# EAGLE board atmega_fusebit_doctor_V2e (EAGLE 5.07)
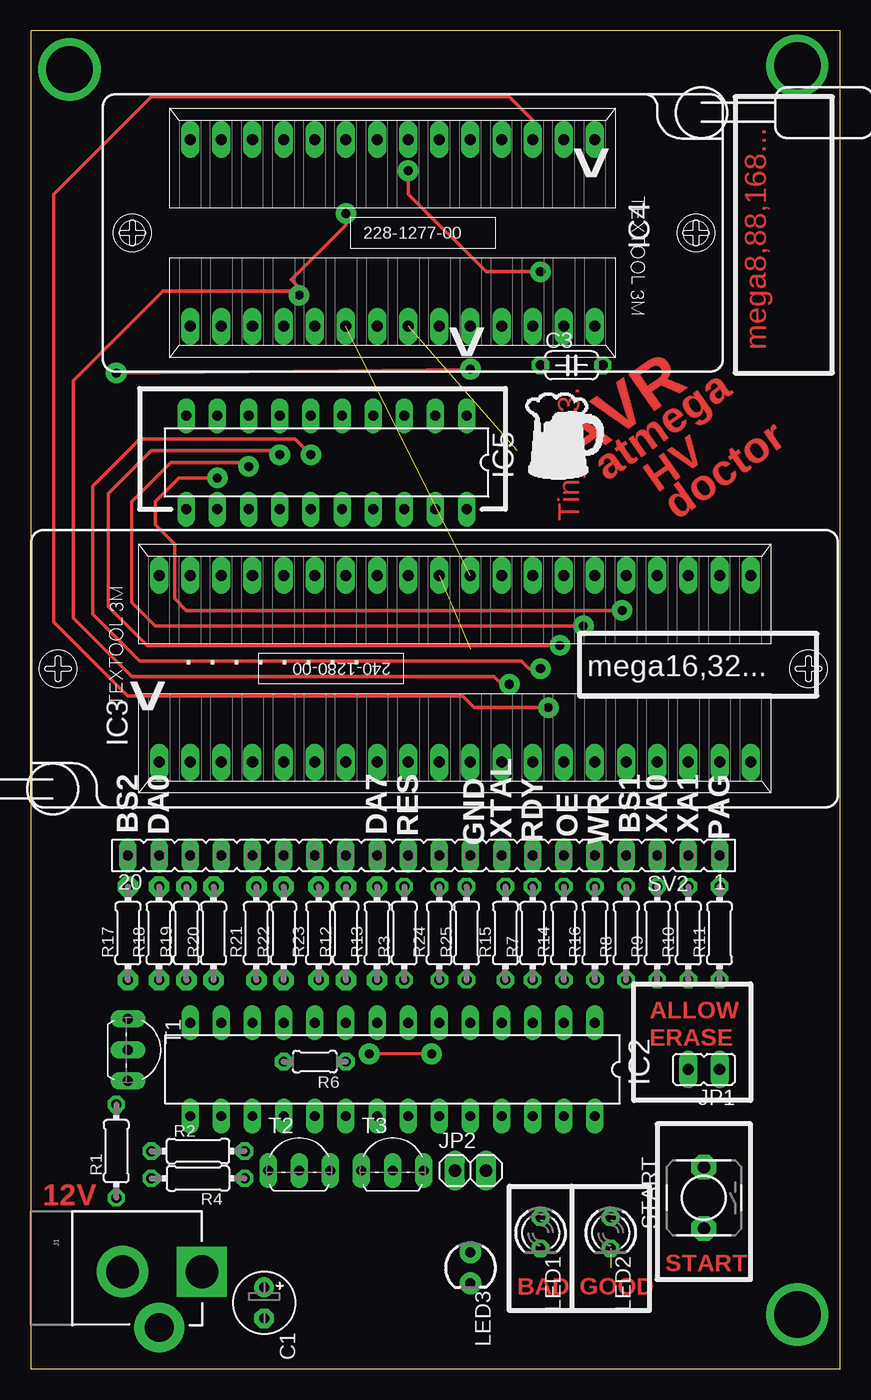
[diagram p0: board, top side]
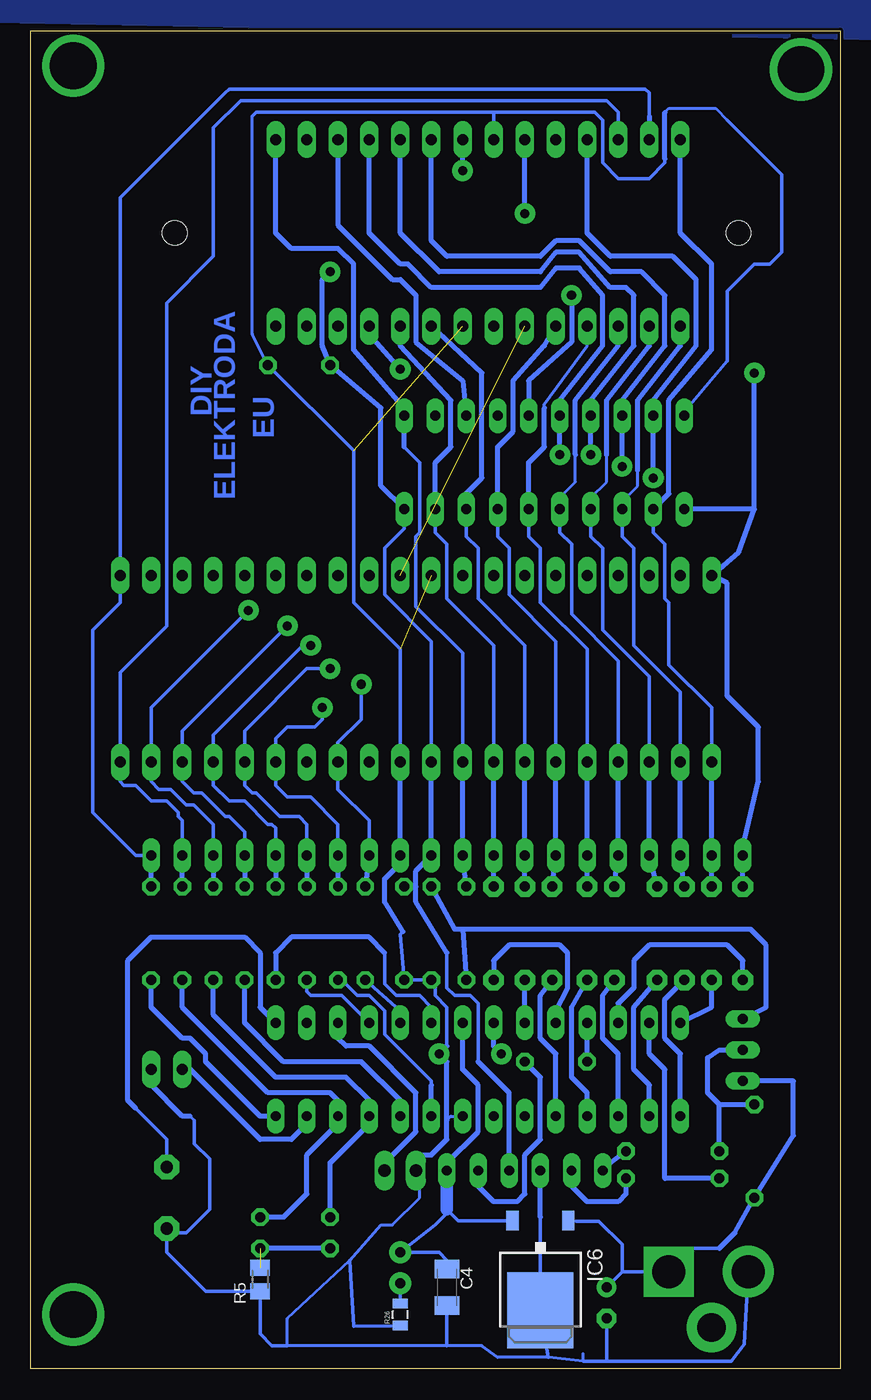
[diagram p1: board, bottom side, seen from below]

Size 66.03 x 109.21 mm. Coordinates in mm from the lower left corner, seen from the top.
Outline: 0,109.21 0,0 66.03,0 66.03,109.21 0,109.21
Copper layers (1*16): Top 0.035mm / dielectric 1.5mm / Bottom 0.035mm
Design rules "SparkFun": minimum track width 8mil, minimum drill 20mil, track to track 8mil, track to pad 8mil, pad to pad 8mil, via to via 8mil, smd to smd 8mil, copper to edge 10mil, drill to drill 8mil, minimum pad ring 12mil, minimum via ring 10mil, stop-mask expansion 4mil, vias tented up to drill 25mil, thermal gap 10mil

## Footprints (pad centres in the part's own frame; a part is rotated, then mirrored left to right if it is on the bottom)
E2,5-5 = drill 0.813 pad 1.6 round: + -1.27,0 | drill 0.813 pad 1.6 octagon: - 1.27,0
C050-024X044 = drill 0.813 octagon: 1 -2.54,0; 2 2.54,0
C1206K = smd 1.5 x 2: 1 -1.5,0; 2 1.5,0
DIL28-3 = drill 0.813 long: 1 -16.51,-3.81; 2 -13.97,-3.81; 3 -11.43,-3.81; 4 -8.89,-3.81; 5 -6.35,-3.81; 6 -3.81,-3.81; 7 -1.27,-3.81; 8 1.27,-3.81; 9 3.81,-3.81; 10 6.35,-3.81; 11 8.89,-3.81; 12 11.43,-3.81; 13 13.97,-3.81; 14 16.51,-3.81; 15 16.51,3.81; 16 13.97,3.81; 17 11.43,3.81; 18 8.89,3.81; 19 6.35,3.81; 20 3.81,3.81; 21 1.27,3.81; 22 -1.27,3.81; 23 -3.81,3.81; 24 -6.35,3.81; 25 -8.89,3.81; 26 -11.43,3.81; 27 -13.97,3.81; 28 -16.51,3.81
240-1280-00-0602J = drill 0.9 long: 1 -24.13,-7.62; 2 -21.59,-7.62; 3 -19.05,-7.62; 4 -16.51,-7.62; 5 -13.97,-7.62; 6 -11.43,-7.62; 7 -8.89,-7.62; 8 -6.35,-7.62; 9 -3.81,-7.62; 10 -1.27,-7.62; 11 1.27,-7.62; 12 3.81,-7.62; 13 6.35,-7.62; 14 8.89,-7.62; 15 11.43,-7.62; 16 13.97,-7.62; 17 16.51,-7.62; 18 19.05,-7.62; 19 21.59,-7.62; 20 24.13,-7.62; 21 24.13,7.62; 22 21.59,7.62; 23 19.05,7.62; 24 16.51,7.62; 25 13.97,7.62; 26 11.43,7.62; 27 8.89,7.62; 28 6.35,7.62; 29 3.81,7.62; 30 1.27,7.62; 31 -1.27,7.62; 32 -3.81,7.62; 33 -6.35,7.62; 34 -8.89,7.62; 35 -11.43,7.62; 36 -13.97,7.62; 37 -16.51,7.62; 38 -19.05,7.62; 39 -21.59,7.62; 40 -24.13,7.62
228-1277-00-0602J = drill 0.9 long: 1 -16.51,-7.62; 2 -13.97,-7.62; 3 -11.43,-7.62; 4 -8.89,-7.62; 5 -6.35,-7.62; 6 -3.81,-7.62; 7 -1.27,-7.62; 8 1.27,-7.62; 9 3.81,-7.62; 10 6.35,-7.62; 11 8.89,-7.62; 12 11.43,-7.62; 13 13.97,-7.62; 14 16.51,-7.62; 15 16.51,7.62; 16 13.97,7.62; 17 11.43,7.62; 18 8.89,7.62; 19 6.35,7.62; 20 3.81,7.62; 21 1.27,7.62; 22 -1.27,7.62; 23 -3.81,7.62; 24 -6.35,7.62; 25 -8.89,7.62; 26 -11.43,7.62; 27 -13.97,7.62; 28 -16.51,7.62 | hole 2: 21.24,0; -24.74,0
DIL20 = drill 0.813 long: 1 -11.43,-3.81; 2 -8.89,-3.81; 3 -6.35,-3.81; 4 -3.81,-3.81; 5 -1.27,-3.81; 6 1.27,-3.81; 7 3.81,-3.81; 8 6.35,-3.81; 9 8.89,-3.81; 10 11.43,-3.81; 11 11.43,3.81; 12 8.89,3.81; 13 6.35,3.81; 14 3.81,3.81; 15 1.27,3.81; 16 -1.27,3.81; 17 -3.81,3.81; 18 -6.35,3.81; 19 -8.89,3.81; 20 -11.43,3.81
TO252 = smd 1 x 1.6: 1 -2.28,-4.8; 2 2.28,-4.8 | smd 5.4 x 6.2: 3 0,2.5
POWER_JACK_2.1X5.5_BIG_PTH = drill 2.667 pad 4.191 round: GND 0,-0.127 | drill 2.337 pad 4.064 round: GNDBREAK 4.547,2.87 | drill 2.667 pad 4.064 square: PWR 0,6.35
JP1 = drill 0.914 long: 1 0,-1.27; 2 0,1.27
1X02 = drill 1.016 long: 1 -1.27,0; 2 1.27,0
LED3MM = drill 0.813 octagon: A -1.27,0; K 1.27,0
LED3MM' = drill 0.813 pad 1.778 round: A -1.27,0; K 1.27,0
0204/7 = drill 0.813 octagon: 1 -3.81,0; 2 3.81,0
M0805 = smd 1.3 x 1.6: 1 -0.95,0; 2 0.95,0
0204/5 = drill 0.813 octagon: 1 -2.54,0; 2 2.54,0
0204/7' = drill 0.813 pad 1.676 octagon: 1 -3.81,0; 2 3.81,0
0805 = smd 0.8 x 1.2: 1 -0.9,0; 2 0.9,0
ALPS-SKHV = drill 1.016 pad 2.032 octagon: 2 -2.51,0; 3 2.51,0
FE20 = drill 0.813 long: 1 -24.13,0; 2 -21.59,0; 3 -19.05,0; 4 -16.51,0; 5 -13.97,0; 6 -11.43,0; 7 -8.89,0; 8 -6.35,0; 9 -3.81,0; 10 -1.27,0; 11 1.27,0; 12 3.81,0; 13 6.35,0; 14 8.89,0; 15 11.43,0; 16 13.97,0; 17 16.51,0; 18 19.05,0; 19 21.59,0; 20 24.13,0
TO92-EBC = drill 0.813 long: B 0,-1.27; C -2.54,-1.27; E 2.54,-1.27

## Placement (x,y rotation side)
C1  100uF  [E2,5-5]  19.05,5.39 270 top
C3  10nF  [C050-024X044]  44.13,81.91 0 top
C4  [C1206K]  32.07,6.66 270 bottom
IC2  ATMEGA8-DOC  [DIL28-3]  29.53,24.44 180 top
IC3  MEGA16/32/644...  [240-1280-00-0602J]  34.61,57.14 0 top
IC4  MEGA8/88/168...  [228-1277-00-0602J]  29.53,92.7 180 top
IC5  AT90S2313/TINY2313  [DIL20]  24.13,73.97 180 top
IC6  7805DT  [TO252]  24.45,7.29 180 bottom
J1  POWER  [POWER_JACK_2.1X5.5_BIG_PTH]  7.62,7.93 270 top
JP1  ERASE  [JP1]  54.93,24.44 90 top
JP2  RS232  [1X02]  35.88,16.18 0 top
LED1  red  [LED3MM]  41.59,11.1 270 top
LED2  green  [LED3MM]  47.31,11.1 270 top
LED3  RED  [LED3MM']  35.88,8.24 270 top
R1  10K  [0204/7]  6.98,17.77 90 top
R2  1K  [0204/7]  13.65,17.77 0 top
R3  100  [0204/7]  30.48,35.55 90 top
R4  4K7  [0204/7]  13.65,15.55 180 top
R5  330  [M0805]  47.31,7.29 90 bottom
R6  4K7  [0204/5]  23.18,25.07 180 top
R7  1K  [0204/7]  40.96,35.55 90 top
R8  1K  [0204/7]  48.58,35.55 90 top
R9  1K  [0204/7]  51.12,35.55 90 top
R10  1K  [0204/7]  53.66,35.55 90 top
R11  1K  [0204/7]  56.2,35.55 90 top
R12  1K  [0204/7']  25.72,35.55 90 top
R13  1K  [0204/7']  28.26,35.55 90 top
R14  1K  [0204/7]  43.5,35.55 90 top
R15  1K  [0204/7]  38.73,35.55 90 top
R16  1K  [0204/7]  46.04,35.55 90 top
R17  1K  [0204/7']  7.94,35.55 90 top
R18  1K  [0204/7']  10.48,35.55 90 top
R19  1K  [0204/7']  12.7,35.55 90 top
R20  1K  [0204/7']  14.92,35.55 90 top
R21  1K  [0204/7']  18.41,35.55 90 top
R22  1K  [0204/7']  20.64,35.55 90 top
R23  1K  [0204/7']  23.5,35.55 90 top
R24  1K  [0204/7]  33.34,35.55 90 top
R25  100  [0204/7]  35.56,35.55 90 top
R26  270  [0805]  35.88,4.43 90 bottom
START  [ALPS-SKHV]  54.93,13.96 90 top
SV2  [FE20]  32.07,41.9 180 top
T1  BC557  [TO92-EBC]  9.21,26.02 270 top
T2  BC547  [TO92-EBC]  21.91,17.45 0 top
T3  BC557  [TO92-EBC]  29.53,17.45 0 top

## Library data of the parts
C1 C3 R1-R11 R14-R16 R24 R25 = rcl
C4 IC3 IC4 J1 LED3 R12 R13 R17-R23 R26 START = digital-toy
IC2 IC5 = atmel
IC6 = linear
JP1 = jumper
JP2 = pinhead
LED1 LED2 = led
SV2 = con-lsta
T1-T3 = transistor

## Nets
+5V: C3.1 IC3.10 IC4.7 IC5.20 R25.2 SV2.10 T3.C
+12V: IC3.9 IC4.1 IC5.1 R3.2 SV2.11
AVCC: IC3.30 IC4.20
BS1: IC3.18 IC4.6 IC5.8 R8.2 SV2.4
BS2: IC3.40 IC4.25 IC5.11 R17.2 SV2.20
DATA0: IC3.1 IC4.14 IC5.12 R18.2 SV2.19
DATA1: IC3.2 IC4.15 IC5.13 R19.2 SV2.18
DATA2: IC3.3 IC4.16 IC5.14 R20.2 SV2.17
DATA3: IC3.4 IC4.17 IC5.15 R21.2 SV2.16
DATA4: IC3.5 IC4.18 IC5.16 R22.2 SV2.15
DATA5: IC3.6 IC4.19 IC5.17 R23.2 SV2.14
DATA6: IC3.7 IC4.23 IC5.18 R12.2 SV2.13
DATA7: IC3.8 IC4.24 IC5.19 R13.2 SV2.12
GND: C1.- C3.2 C4.2 IC2.8 IC2.22 IC3.11 IC3.31 IC4.8 IC4.22 IC5.10 IC6.3 J1.GND JP1.1 JP2.1 R5.1 R24.1 R25.1 R26.1 START.2 SV2.9 T2.E
N$1: R6.1 T3.B
N$2: IC2.14 R18.1
N$3: IC2.3 JP2.2
N$4: IC2.28 R11.1
N$5: IC2.6 R16.1
N$6: IC2.4 R14.1
N$7: LED3.K R26.2
N$8: R2.2 T2.C
N$9: IC2.9 R12.1
N$10: IC2.10 R13.1
N$11: IC2.13 R4.2
N$12: IC2.11 R6.2
N$14: IC2.15 R19.1
N$16: IC2.16 R20.1
N$19: IC2.5 R15.1
N$21: IC2.23 R7.1
N$22: R3.1 R24.2 T1.C
N$24: IC2.17 R21.1
N$25: IC2.18 R22.1
N$26: IC2.19 R23.1
N$27: IC2.12 R17.1
N$29: R4.1 T2.B
N$31: IC2.27 JP1.2
N$32: LED1.K LED2.K R5.2
N$34: R1.2 R2.1 T1.B
N$42: IC2.24 R8.1
N$43: IC2.1 START.3
N$47: IC2.26 LED2.A R10.1
N$48: IC2.25 LED1.A R9.1
OE: IC3.16 IC4.4 IC5.6 R14.2 SV2.6
PAG: IC3.21 IC4.13 R11.2 SV2.1
RDY: IC3.15 IC4.3 IC5.3 R7.2 SV2.7
V+: C1.+ IC6.1 J1.PWR R1.1 T1.E
VCC: C4.1 IC2.7 IC6.2 LED3.A T3.E
WR: IC3.17 IC4.5 IC5.7 R16.2 SV2.5
XA0: IC3.19 IC4.11 IC5.9 R9.2 SV2.3
XA1: IC3.20 IC4.12 R10.2 SV2.2
XTAL1: IC3.13 IC4.9 IC5.5 R15.2 SV2.8

## Tracks (layer width: path | path; a pad name or v marks a point on that pad's centre or on a via)
+5V  (via drill 0.74 pad 1.68)
  Top 0.305: v41.59,89.53 37.15,89.53 30.8,95.88 v30.8,97.78
  Bottom 0.305: 29.53,25.07 29.53,29.84 30.16,30.47 31.43,30.47 32.07,31.11 32.07,33.96 | IC3.10 33.34,59.36 37.15,63.17 37.15,66.98 35.56,68.57 IC5.20
  Bottom 0.406: v30.8,97.78 IC4.7 | IC5.20 37.47,72.06 37.47,78.41 C3.1 42.23,83.49 42.23,88.89 v41.59,89.53 | IC3.10 SV2.10 34.61,40.63 34.61,39.36 | 34.61,39.36 34.61,38.09 32.07,33.96 | T3.C 26.99,22.53 29.53,25.07 | 34.61,39.36 R25.2
+12V
  Bottom 0.305: 35.56,75.24 34.29,73.97 34.29,68.25 34.61,67.94 34.61,62.22 30.8,58.41 IC3.9
  Bottom 0.406: IC4.1 46.04,92.7 44.77,91.43 40.96,91.43 39.69,90.16 39.69,83.17 35.56,78.41 IC5.1 35.56,75.24 | SV2.11 IC3.9 | SV2.11 30.8,41.27 | R3.2 SV2.11
AVCC  (1 unrouted)
BS1  (via drill 0.74 pad 1.68)
  Top 0.305: v45.09,60.63 10.16,60.63 8.25,62.54 8.25,70.79 11.43,73.97 17.46,73.97 v17.78,73.65
  Bottom 0.305: 48.58,43.17 48.58,43.81 49.85,45.08 50.16,45.08 52.07,46.98 52.7,46.98 53.66,47.93 IC3.18 53.66,52.06 v45.09,60.63
  Bottom 0.406: IC4.6 33.34,92.06 32.07,90.8 24.45,90.8 23.18,92.06 21.27,92.06 18.73,89.53 16.19,89.53 14.29,87.62 14.29,83.49 17.78,79.05 IC5.8 v17.78,73.65 | 48.58,43.17 SV2.4 R8.2
BS2  (via drill 0.74 pad 1.68)
  Top 0.254: v6.98,81.27 v35.88,81.59
  Bottom 0.406: IC4.25 38.42,84.45 v35.88,81.59 | 6.98,70.16 8.25,66.67 IC3.40 9.21,64.12 9.21,54.92 6.67,52.38 6.67,47.93 7.94,42.53 SV2.20 R17.2 | 6.98,70.16 v6.98,81.27 | 6.98,70.16 IC5.11
DATA0
  Bottom 0.305: IC3.1 10.48,53.97 13.97,57.46 13.97,62.54 14.29,62.86 14.29,67.3 15.24,68.25 IC5.12
  Bottom 0.406: IC4.14 13.02,92.7 10.48,90.16 10.48,83.17 13.97,79.05 13.97,71.43 IC5.12 | IC3.1 SV2.19 R18.2
DATA1
  Bottom 0.254: IC5.13 17.78,70.79 16.51,72.06 16.51,73.33
  Bottom 0.305: IC3.2 13.02,55.23 16.83,59.05 16.83,66.98 17.78,67.94 IC5.13
  Bottom 0.406: IC4.15 13.02,83.49 16.51,79.05 16.51,73.33 | IC3.2 SV2.18 R19.2
DATA2
  Bottom 0.254: IC5.14 20.32,71.11 19.05,72.38 19.05,74.6
  Bottom 0.305: IC3.3 15.56,56.5 19.37,60.31 19.37,66.98 20.32,67.94 IC5.14
  Bottom 0.406: IC4.16 15.56,83.49 19.05,79.05 19.05,74.6 | R20.2 SV2.17 IC3.3
DATA3
  Bottom 0.254: 22.54,69.84 IC5.15 22.86,71.11 21.59,72.38 21.59,74.6
  Bottom 0.305: IC3.4 18.1,57.78 21.91,61.58 21.91,67.3 22.86,68.25 IC5.15
  Bottom 0.406: IC4.17 18.1,83.49 21.59,79.05 21.59,74.6 | R21.2 SV2.16 IC3.4
DATA4
  Bottom 0.254: 24.13,78.41 24.13,78.73 20.64,83.49 IC4.18
  Bottom 0.305: IC3.5 20.64,58.73 24.45,62.54 24.45,66.98 25.4,67.94 IC5.16
  Bottom 0.406: 24.13,78.41 24.13,75.24 25.4,73.97 IC5.16 | IC3.5 SV2.15 R22.2
DATA5
  Bottom 0.305: IC3.6 23.18,59.36 26.99,63.17 26.99,66.98 27.94,67.94 IC5.17
  Bottom 0.406: IC4.19 24.13,83.49 26.67,80.64 26.67,76.51 27.94,75.24 IC5.17 | R23.2 SV2.14 IC3.6
DATA6
  Bottom 0.254: IC5.18 30.16,69.84
  Bottom 0.305: IC3.7 25.72,59.05 29.53,62.86 29.53,66.98 30.48,67.94 IC5.18
  Bottom 0.406: IC4.23 29.21,81.27 29.21,72.7 30.48,71.43 IC5.18 | R12.2 SV2.13 IC3.7
DATA7
  Bottom 0.254: IC5.19 32.7,69.84
  Bottom 0.305: IC3.8 28.26,59.05 32.07,62.86 32.07,67.3 33.02,68.25 IC5.19
  Bottom 0.406: IC4.24 35.88,83.49 31.75,79.05 31.75,75.24 33.02,73.97 IC5.19 | IC3.8 SV2.12 R13.2
GND  (via drill 0.74 pad 1.68)  (2 unrouted)
  Top 0.254: v32.7,25.71 v27.62,25.71
  Bottom 0.254: C3.2 47.94,84.45 47.94,102.23 | 52.67,20.27 53.02,20.63 | JP2.1 34.29,15.87 34.29,13.96 36.51,11.74 37.47,11.74 40.01,8.88 45.09,4.12 45.09,1.89 32.07,1.89 29.21,1.89 27.94,0.94 23.81,0.94 20.95,0.62 20.95,1.26 | IC2.22 31.75,20.63 32.07,20.31 | IC5.10 12.7,78.09 9.21,82.22 | 9.21,101.91 10.16,102.86 13.97,102.86 14.29,102.54
  Bottom 0.305: R26.1 39.69,3.48 40.01,8.88 | J1.GND 7.81,2.02 8.89,0.62 19.05,0.62 | 19.05,0.62 20.95,0.62 | 19.05,0.62 C1.- | 24.45,12.37 IC6.3 23.81,0.94 | 32.07,1.89 C4.2 | 45.09,1.89 46.36,1.89 47.31,2.85 R5.1 51.76,6.34 54.93,9.52 START.2 54.58,11.1 53.34,11.1 51.44,13.01 51.44,17.13 52.67,18.37 52.67,20.27 | 32.07,26.34 32.07,29.52 33.02,30.47 33.02,31.11 R24.1 R25.1 35.88,35.47 35.66,35.68 | 9.21,82.22 9.21,87.94 6.98,90.16 5.72,90.16 4.76,91.11 4.76,97.46 9.21,101.91 | 14.29,98.73 14.29,98.42 15.56,97.15 18.1,97.15 19.37,98.42 19.37,101.91 20,102.54 28.26,102.54 | 28.26,102.54 47.62,102.54 47.94,102.23 | 28.26,102.54 IC4.8 | IC3.11 35.88,58.73 39.69,62.54 39.69,74.92 C3.2
  Bottom 0.406: 32.07,26.34 v32.7,25.71 32.07,25.07 32.07,20.31 32.07,18.72 33.34,17.45 34.61,17.45 JP2.1 | 14.29,98.73 14.29,102.54 | v27.62,25.71 28.26,26.34 IC2.8 | IC3.11 SV2.9 35.88,41.27 37.15,40 37.15,38.09 35.66,35.68 | 24.45,12.37 T2.E | JP1.1 56.2,23.17 53.66,20.63 53.02,20.63
  pour Bottom: 75.25,110.16 -5.72,108.58 -4.44,134.29 74.93,133.02
N$1
  Bottom 0.406: R6.1 24.45,23.8 24.45,18.72 25.72,17.45 25.72,14.28 26.35,13.64 28.26,13.64 29.53,14.91 T3.B
N$2
  Bottom 0.406: R18.1 10.48,29.52 IC2.14
N$3
  Bottom 0.406: IC2.3 40.96,26.98 40.32,26.34 38.42,26.34 34.61,22.53 34.61,19.36 37.15,16.82 JP2.2
N$4
  Bottom 0.406: R11.1 56.2,29.52 53.66,26.98 53.02,26.98 51.75,25.71 51.75,25.07 47.31,20.63 IC2.28
N$5
  Bottom 0.305: IC2.6 33.34,29.52 34.29,30.47 36.19,30.47 37.15,31.42 37.15,33.96
  Bottom 0.406: R16.1 46.04,33.96 44.77,35.23 38.42,35.23 37.15,33.96
N$6
  Bottom 0.305: IC2.4 40.64,30.47 43.18,30.47 43.5,30.79 R14.1
N$7
  Bottom 0.305: LED3.K R26.2
N$8
  Bottom 0.406: R2.2 18.73,16.82 T2.C
N$9
  Bottom 0.406: IC2.9 R12.1
N$10
  Bottom 0.406: IC2.10 23.18,29.2 22.23,31.11 22.23,33.96 22.86,34.6 26.99,34.6 28.26,33.33 R13.1
N$11
  Bottom 0.406: R4.2 14.29,15.55 14.29,24.44 15.56,25.71 IC2.13
N$12
  Bottom 0.406: R6.2 IC2.11
N$13  (via drill 3.81 pad 5.08)
  other vias: 62.55,4.43
N$14
  Bottom 0.406: R19.1 14.29,30.15 14.29,26.98 13.02,25.71 IC2.15
N$15  (via drill 3.81 pad 5.08)
  other vias: 62.55,106.35
N$16
  Bottom 0.406: R20.1 16.83,29.52 16.83,24.44 15.56,23.17 IC2.16
N$17  (via drill 3.81 pad 5.08)
  other vias: 3.17,106.03
N$19
  Bottom 0.305: 35.88,29.2 R15.1
  Bottom 0.406: IC2.5 35.88,29.2
N$21
  Bottom 0.305: 33.34,23.17 33.34,23.48 37.15,27.29 37.15,29.2 38.42,30.47 39.37,30.47 40.32,31.42 40.64,31.42 R7.1
  Bottom 0.406: IC2.23 33.34,23.17
N$22
  Bottom 0.406: 30.8,35.87 R3.1 | 30.8,35.87 7.3,35.87 6.03,34.6 6.03,29.52 T1.C | 30.8,35.87 31.43,35.87 R24.2
N$24
  Bottom 0.406: R21.1 19.37,30.47 19.37,26.98 18.1,25.71 IC2.17
N$25
  Bottom 0.406: R22.1 21.91,29.52 21.91,23.8 20.64,22.53 IC2.18
N$26
  Bottom 0.406: R23.1 24.45,30.47 24.45,26.98 23.18,25.71 IC2.19
N$27
  Bottom 0.406: R17.1 7.94,33.33 9.21,34.6 15.56,34.6 16.83,33.33 16.83,31.11 18.1,29.84 IC2.12
N$29
  Bottom 0.406: R4.1 17.46,14.28 18.1,13.64 20.64,13.64 21.91,14.91 T2.B
N$31
  Bottom 0.406: IC2.27 43.5,19.99 44.77,18.72 47.31,18.72 53.02,24.44 JP1.2
N$32  (1 unrouted)
  Bottom 0.406: LED1.K LED2.K
N$34
  Bottom 0.406: T1.B 9.84,26.02 10.79,25.39 10.79,22.53 9.84,21.58 | R2.1 9.84,21.58 | 9.84,21.58 R1.2
N$42
  Bottom 0.406: R8.1 48.58,28.25 45.4,25.07 39.05,25.07 35.88,21.9 IC2.24
N$43
  Bottom 0.305: START.3 54.93,18.72 57.47,21.26
  Bottom 0.406: IC2.1 47.31,29.52 47.31,33.96 48.58,35.23 56.2,35.23 58.1,33.33 58.1,21.9 57.47,21.26
N$47
  Bottom 0.406: LED2.A 45.4,12.37 43.5,14.28 43.5,17.45 40.96,19.99 IC2.26 40.96,21.9 41.59,22.53 46.67,22.53 53.66,29.52 R10.1
N$48
  Bottom 0.406: R9.1 51.12,28.88 46.04,23.8 40.32,23.8 38.42,21.9 IC2.25 38.42,19.99 41.59,16.82 LED1.A
OE  (via drill 0.74 pad 1.68)
  Top 0.305: v41.59,57.14 40.64,57.14 40.01,57.78 8.89,57.78 5.08,61.58 5.08,72.06 8.89,75.87 21.59,75.87 v22.86,74.6
  Bottom 0.305: 43.5,43.17 43.5,44.44 44.13,45.08 45.72,45.08 47.62,46.98 47.94,46.98 48.58,47.61 IC3.16 48.58,52.06 43.5,57.14 v41.59,57.14
  Bottom 0.406: IC4.4 38.42,92.7 35.88,90.16 35.24,90.16 33.34,88.26 24.45,88.26 23.18,89.84 21.27,89.84 19.37,87.62 19.37,83.49 22.86,79.05 IC5.6 v22.86,74.6 | 43.5,43.17 SV2.6 R14.2
PAG
  Bottom 0.305: SV2.1 57.47,41.9 60.96,45.39 60.96,60.31 58.74,62.54 IC3.21 58.74,95.56 50.16,104.13 49.85,104.45 15.87,104.45 15.56,104.13 15.56,102.23
  Bottom 0.406: 15.56,102.23 IC4.13 | R11.2 SV2.1
RDY  (via drill 0.74 pad 1.68)
  Top 0.305: IC4.3 40.96,101.91 39.05,103.81 9.84,103.81 1.9,95.88 1.9,60.95 7.94,54.92 35.24,54.92 36.19,53.97 v42.23,53.97
  Bottom 0.305: 40.96,43.17 40.96,44.44 43.18,46.66 45.09,46.66 46.04,47.61 IC3.15 46.04,51.42 45.09,52.38 42.86,52.38 42.23,53.01 v42.23,53.97
  Bottom 0.406: IC4.3 40.96,93.34 36.51,88.89 35.88,88.89 34.61,87.62 34.61,83.81 30.8,80.64 IC5.3 | 40.96,43.17 SV2.7 R7.2
V+
  Bottom 0.305: 9.84,9.83 12.07,9.83 J1.PWR 17.78,7.93 | 17.78,7.93 C1.+ | 17.78,7.93 17.78,10.15 19.68,12.05 21.5,12.05 IC6.1
  Bottom 0.406: T1.E 3.81,23.48 3.81,19.04 R1.1 8.57,11.1 9.84,9.83
VCC
  Bottom 0.305: IC6.2 31.15,12.09 31.91,12.85 | 31.91,12.85 32.07,13.01 | 31.91,12.85 33.02,11.74 LED3.A 32.7,9.52 32.07,8.88 C4.1
  Bottom 0.406: IC2.7 30.8,24.44 29.53,23.17 29.53,19.36 32.07,16.82 T3.E
  Bottom 1.016: 32.07,13.01 T3.E
WR  (via drill 0.74 pad 1.68)
  Top 0.305: v43.18,59.05 9.53,59.05 6.35,62.22 6.35,71.43 9.84,74.92 20,74.92 v20.32,74.6
  Bottom 0.305: 46.04,43.17 46.04,44.12 46.36,44.44 46.67,44.44 48.58,46.34 49.85,46.34 51.12,47.61 IC3.17 51.12,51.74 43.81,59.05 v43.18,59.05
  Bottom 0.406: v20.32,74.6 IC5.7 20.32,79.05 16.83,83.49 16.83,87.62 17.46,88.26 18.73,88.26 21.27,91.11 23.18,91.11 24.45,89.53 32.7,89.53 35.88,92.7 IC4.5 | 46.04,43.17 SV2.5 R16.2
XA0  (via drill 0.74 pad 1.68)
  Top 0.305: v48.26,61.9 12.7,61.9 11.75,62.86 11.75,67.3 10.16,68.89 10.16,70.79 12.07,72.7 v15.24,72.7
  Bottom 0.305: 51.12,43.17 51.12,44.44 52.7,46.03 53.34,46.03 54.61,47.3 55.56,47.3 56.2,47.93 IC3.19 56.2,53.97 v48.26,61.9
  Bottom 0.406: IC4.11 20.64,92.7 18.73,90.8 13.65,90.8 11.75,88.89 11.75,83.49 15.24,79.05 IC5.9 v15.24,72.7 | 51.12,43.17 SV2.3 R9.2
XA1
  Bottom 0.305: 53.66,43.17 53.66,44.76 53.98,45.08 53.98,45.39 54.93,46.34 56.2,46.34 57.47,47.61 58.42,47.61 58.74,47.93 IC3.20 58.74,56.82 54.93,60.63 54.93,86.98 51.12,90.8 51.12,101.27 48.9,103.5 19.05,103.5 18.1,102.54 IC4.12
  Bottom 0.406: 53.66,43.17 SV2.2 R10.2
XTAL1  (via drill 0.74 pad 1.68)
  Top 0.305: v25.72,94.29 25.72,93.34 21.27,88.89 21.91,88.26 v21.91,87.62 21.59,87.94 10.79,87.94 3.49,80.64 3.49,61.27 8.25,56.5 37.78,56.5 38.42,55.87 v39.05,55.87
  Bottom 0.305: SV2.8 38.42,44.76 40.96,47.3 IC3.13 40.96,51.11 39.05,53.01 v39.05,55.87
  Bottom 0.406: v25.72,94.29 IC4.9 | v21.91,87.62 21.91,83.81 25.4,80.64 IC5.5 | SV2.8 R15.2

## Text on the board
Top: mega8,88,168... | AVR | atmega | HV | Tiny2313. | doctor | ALLOW | ERASE | 12V | START | BAD | GOOD
Bottom: ELEKTRODA | DIY | EU
tPlace: ^ | ^ | ^ | . . . . . . . . | mega16,32... | XTAL | BS2 | DA0 | DA7 | RES | GND | RDY | BS1 | XA0 | XA1 | PAG | OE | WR